# Altium PCB pcb.PcbDoc (part 4 of 9)
Units mil, origin at the board's own origin, x right, y up, seen from the top; angles counter-clockwise.
Board outline 3937.01 x 3937.01 mil, 4 copper layers (Top Layer, Ground plane, Power plane, Bottom Layer), stack 51.4 mil thick; 310 components, 276 nets, 1704 pads, 977 vias.
Unrouted connection lines stored in the file: 44.
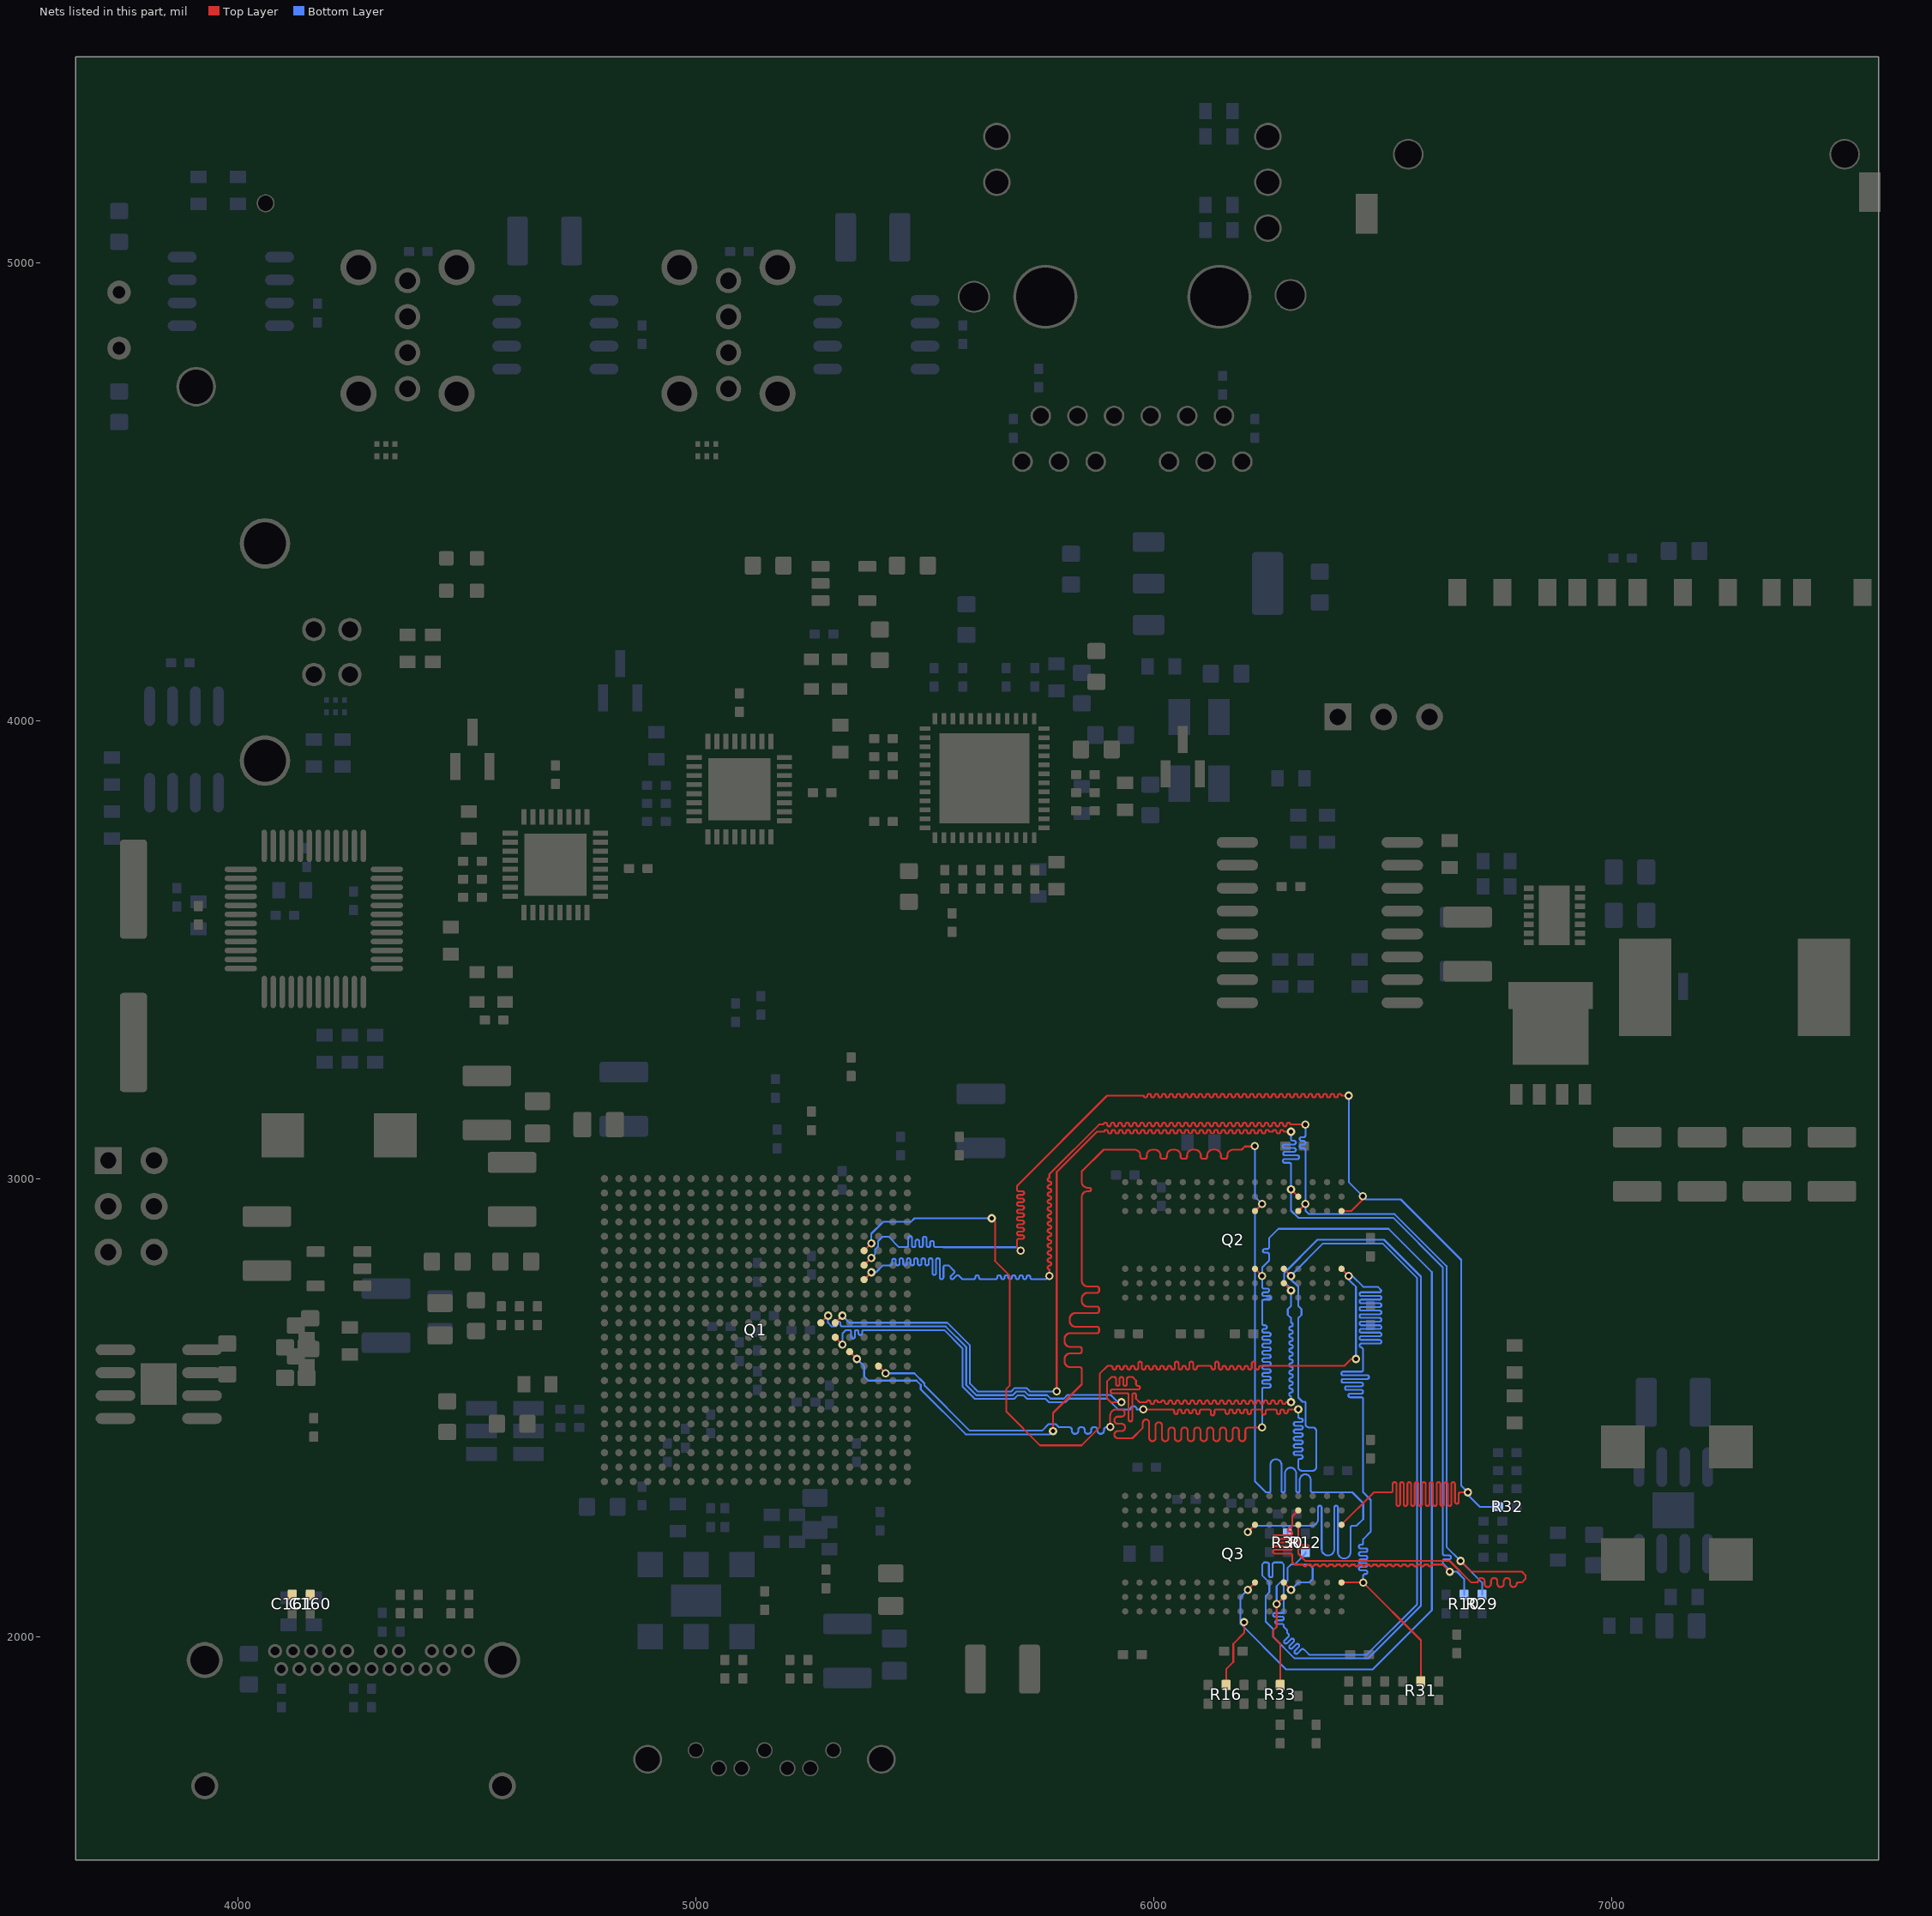
[diagram p5: the nets of this part, all layers, seen from the top]

## Via types
v1: diameter 18, hole 10, Top Layer to Bottom Layer, 932 vias
v2: diameter 19.68, hole 9.84, Top Layer to Bottom Layer, tented both sides, 18 vias
v3: diameter 19.68, hole 9.84, Top Layer to Bottom Layer, 16 vias
v4: diameter 19.68, hole 7.87, Top Layer to Bottom Layer, 11 vias

## Nets (pads, with @x,y where several pads share a name; then routed paths per layer and width w, separated by ;. In a path a pad name is that pad's centre, name@x,y a point inside that pad or via, vN(x,y) a via of type N, cw(c..) or ccw(c..) an arc to the next point about the centre after c; other vN are vias at no path point) (continued)
A12: Q1.H19 Q2.N7 Q3.N7 R29.1 | length 4188.3
  Top Layer w4: Q1.H19@5366.93,2779.53 v1(5382.68,2795.28) ; v1(5771.65,2787.4) 5771.65,2801.86 cw(c5771.65,2805.86) 5771.65,2809.86 ccw(c5771.65,2813.86) 5771.65,2817.86 cw(c5771.65,2821.86) 5771.65,2825.86 ccw(c5771.65,2829.86) 5771.65,2833.86 cw(c5771.65,2837.86) 5771.65,2841.86 ccw(c5771.65,2845.86) 5771.65,2849.86 cw(c5771.65,2853.86) 5771.65,2857.86 ccw(c5771.65,2861.86) 5771.65,2865.86 cw(c5771.65,2869.86) 5771.65,2873.86 ccw(c5771.65,2877.86) 5771.65,2881.86 cw(c5771.65,2885.86) 5771.65,2889.86 ccw(c5771.65,2893.86) 5771.65,2897.86 cw(c5771.65,2901.86) 5771.65,2905.86 ccw(c5771.65,2909.86) 5771.65,2913.86 cw(c5771.65,2917.86) 5771.65,2921.86 ccw(c5771.65,2925.86) 5771.65,2929.86 cw(c5771.65,2933.86) 5771.65,2937.86 ccw(c5771.65,2941.86) 5771.65,2945.86 cw(c5771.65,2949.86) 5771.65,2953.86 ccw(c5771.65,2957.86) 5771.65,2961.86 cw(c5771.65,2965.86) 5771.65,2969.86 ccw(c5771.65,2973.86) 5771.65,2977.86 cw(c5771.65,2981.86) 5771.65,2985.86 ccw(c5771.65,2989.86) 5771.65,2993.86 cw(c5771.65,2997.86) 5771.65,3001.86 5771.65,3009.86 5879.9,3118.11 5889.76,3118.11 cw(c5893.76,3118.11) 5897.76,3118.11 ccw(c5901.76,3118.11) 5905.76,3118.11 cw(c5909.76,3118.11) 5913.76,3118.11 ccw(c5917.76,3118.11) 5921.76,3118.11 cw(c5925.76,3118.11) 5929.76,3118.11 ccw(c5933.76,3118.11) 5937.76,3118.11 cw(c5941.76,3118.11) 5945.76,3118.11 ccw(c5949.76,3118.11) 5953.76,3118.11 cw(c5957.76,3118.11) 5961.76,3118.11 ccw(c5965.76,3118.11) 5969.76,3118.11 cw(c5973.76,3118.11) 5977.76,3118.11 ccw(c5981.76,3118.11) 5985.76,3118.11 cw(c5989.76,3118.11) 5993.76,3118.11 ccw(c5997.76,3118.11) 6001.76,3118.11 cw(c6005.76,3118.11) 6009.76,3118.11 ccw(c6013.76,3118.11) 6017.76,3118.11 cw(c6021.76,3118.11) 6025.76,3118.11 ccw(c6029.76,3118.11) 6033.76,3118.11 cw(c6037.76,3118.11) 6041.76,3118.11 ccw(c6045.76,3118.11) 6049.76,3118.11 cw(c6053.76,3118.11) 6057.76,3118.11 ccw(c6061.76,3118.11) 6065.76,3118.11 cw(c6069.76,3118.11) 6073.76,3118.11 ccw(c6077.76,3118.11) 6081.76,3118.11 cw(c6085.76,3118.11) 6089.76,3118.11 ccw(c6093.76,3118.11) 6097.76,3118.11 cw(c6101.76,3118.11) 6105.76,3118.11 ccw(c6109.76,3118.11) 6113.76,3118.11 cw(c6117.76,3118.11) 6121.76,3118.11 ccw(c6125.76,3118.11) 6129.76,3118.11 cw(c6133.76,3118.11) 6137.76,3118.11 ccw(c6141.76,3118.11) 6145.76,3118.11 cw(c6149.76,3118.11) 6153.76,3118.11 ccw(c6157.76,3118.11) 6161.76,3118.11 cw(c6165.76,3118.11) 6169.76,3118.11 ccw(c6173.76,3118.11) 6177.76,3118.11 cw(c6181.76,3118.11) 6185.76,3118.11 ccw(c6189.76,3118.11) 6193.76,3118.11 cw(c6197.76,3118.11) 6201.76,3118.11 ccw(c6205.76,3118.11) 6209.76,3118.11 cw(c6213.76,3118.11) 6217.76,3118.11 ccw(c6221.76,3118.11) 6225.76,3118.11 cw(c6229.76,3118.11) 6233.76,3118.11 ccw(c6237.76,3118.11) 6241.76,3118.11 cw(c6245.76,3118.11) 6249.76,3118.11 ccw(c6253.76,3118.11) 6257.76,3118.11 cw(c6261.76,3118.11) 6265.76,3118.11 ccw(c6269.76,3118.11) 6273.76,3118.11 cw(c6277.76,3118.11) 6281.76,3118.11 ccw(c6285.76,3118.11) 6289.76,3118.11 cw(c6293.76,3118.11) 6297.76,3118.11 v1(6330.71,3118.11) ; Q3.N7@6314.96,2244.09 6314.96,2204.22 ccw(c6318.96,2204.22) 6318.96,2200.22 6334.47,2200.22 cw(c6334.47,2196.22) 6338.47,2196.22 cw(c6334.47,2196.22) 6334.47,2192.22 6318.21,2192.22 ccw(c6318.21,2188.98) 6314.96,2188.98 6314.96,2181.1 6330.71,2165.35 6645.67,2165.35 6692.91,2118.11 6704.79,2118.11 ccw(c6704.79,2121.11) 6707.79,2121.11 cw(c6714.79,2121.11) 6714.79,2128.11 cw(c6714.79,2121.11) 6721.79,2121.11 6721.79,2115.24 ccw(c6728.79,2115.24) 6728.79,2108.24 ccw(c6728.79,2115.24) 6735.79,2115.24 6735.79,2120.98 cw(c6742.79,2120.98) 6742.79,2127.98 cw(c6742.79,2120.98) 6749.79,2120.98 6749.79,2115.24 ccw(c6756.79,2115.24) 6756.79,2108.24 ccw(c6756.79,2115.24) 6763.79,2115.24 6763.79,2120.99 cw(c6770.79,2120.99) 6770.79,2127.99 cw(c6770.79,2120.99) 6777.79,2120.99 6777.79,2115.24 ccw(c6784.79,2115.24) 6784.79,2108.24 ccw(c6784.79,2115.24) 6791.79,2115.15 ; Q2.N7@6314.96,2929.13 v1(6330.71,2944.88) ; v1(6669.29,2165.35) 6693.04,2141.61 6735.6,2141.61 6735.72,2141.73 6803.15,2141.73 6811.02,2133.86 6811.02,2125.98 6803.15,2118.11 6794.79,2118.11 ccw(c6794.79,2115.11) 6791.79,2115.2 ; 6791.79,2115.15 cw(c6794.79,2115.11) 6791.79,2115.2 ; 6791.79,2115.15 ccw(c6784.79,2115.24) 6791.79,2115.2 ; 6791.79,2115.15 6791.79,2115.2
  Bottom Layer w4: v1(5382.68,2795.28) 5392.96,2795.28 5408.21,2810.53 5424.21,2810.53 ccw(c5424.21,2814.53) 5428.21,2814.53 5428.21,2820.81 cw(c5432.21,2820.81) 5432.21,2824.81 cw(c5432.21,2820.81) 5436.21,2820.81 5436.21,2814.53 ccw(c5440.21,2814.53) 5440.21,2810.53 ccw(c5440.21,2814.53) 5444.21,2814.53 5444.21,2822.14 cw(c5448.21,2822.14) 5448.21,2826.14 cw(c5448.21,2822.14) 5452.21,2822.14 5452.21,2814.53 ccw(c5456.21,2814.53) 5456.21,2810.53 ccw(c5456.21,2814.53) 5460.21,2814.53 5460.21,2822.14 cw(c5464.21,2822.14) 5464.21,2826.14 cw(c5464.21,2822.14) 5468.21,2822.14 5468.21,2814.53 ccw(c5472.21,2814.53) 5472.21,2810.53 ccw(c5472.21,2814.53) 5476.21,2814.53 5476.21,2822.14 cw(c5480.21,2822.14) 5480.21,2826.14 cw(c5480.21,2822.14) 5484.21,2822.14 5484.21,2814.53 ccw(c5488.21,2814.53) 5488.21,2810.53 ccw(c5488.21,2814.53) 5492.21,2814.53 5492.21,2822.14 cw(c5496.21,2822.14) 5496.21,2826.14 cw(c5496.21,2822.14) 5500.21,2822.14 5500.21,2814.53 ccw(c5504.21,2814.53) 5504.21,2810.53 ccw(c5504.21,2814.53) 5508.21,2814.53 5508.21,2822.14 cw(c5512.21,2822.14) 5512.21,2826.14 cw(c5512.21,2822.14) 5516.21,2822.14 5516.21,2793.85 ccw(c5520.21,2793.85) 5520.21,2789.85 ccw(c5520.21,2793.85) 5524.21,2793.85 5524.21,2822.14 cw(c5528.21,2822.14) 5528.21,2826.14 cw(c5528.21,2822.14) 5532.21,2822.14 5532.21,2784.4 ccw(c5536.21,2784.4) 5536.21,2780.4 ccw(c5536.21,2784.4) 5540.21,2784.4 5540.21,2806.53 cw(c5544.21,2806.53) 5544.21,2810.53 5551.68,2810.53 5562.99,2799.21 cw(c5560.16,2796.39) 5562.99,2793.56 5556.66,2787.23 ccw(c5559.49,2784.4) 5556.66,2781.57 ccw(c5559.49,2784.4) 5562.32,2781.57 5568.65,2787.9 cw(c5571.48,2785.07) 5574.3,2787.9 5581.8,2780.4 5605.8,2780.4 ccw(c5605.8,2784.4) 5609.8,2784.4 5609.8,2784.86 cw(c5613.8,2784.86) 5613.8,2788.86 cw(c5613.8,2784.86) 5617.8,2784.86 5617.8,2784.4 ccw(c5621.8,2784.4) 5621.8,2780.4 5653.8,2780.4 ccw(c5653.8,2784.4) 5657.8,2784.4 5657.8,2784.99 cw(c5661.8,2784.99) 5661.8,2788.99 cw(c5661.8,2784.99) 5665.8,2784.99 5665.8,2784.4 ccw(c5669.8,2784.4) 5669.8,2780.4 ccw(c5669.8,2784.4) 5673.8,2784.4 5673.8,2784.99 cw(c5677.8,2784.99) 5677.8,2788.99 cw(c5677.8,2784.99) 5681.8,2784.99 5681.8,2784.4 ccw(c5685.8,2784.4) 5685.8,2780.4 ccw(c5685.8,2784.4) 5689.8,2784.4 5689.8,2784.99 cw(c5693.8,2784.99) 5693.8,2788.99 cw(c5693.8,2784.99) 5697.8,2784.99 5697.8,2784.4 ccw(c5701.8,2784.4) 5701.8,2780.4 ccw(c5701.8,2784.4) 5705.8,2784.4 5705.8,2784.99 cw(c5709.8,2784.99) 5709.8,2788.99 cw(c5709.8,2784.99) 5713.8,2784.99 5713.8,2784.4 ccw(c5717.8,2784.4) 5717.8,2780.4 ccw(c5717.8,2784.4) 5721.8,2784.4 5721.8,2784.87 cw(c5725.8,2784.87) 5725.8,2788.87 cw(c5725.8,2784.87) 5729.8,2784.87 5729.8,2784.4 ccw(c5733.8,2784.4) 5733.8,2780.4 5764.65,2780.4 v1(5771.65,2787.4) ; v1(6330.71,3118.11) 6330.71,3094.36 cw(c6326.71,3094.36) 6326.71,3090.36 6322.02,3090.36 ccw(c6322.02,3086.36) 6318.02,3086.36 ccw(c6322.02,3086.36) 6322.02,3082.36 6326.71,3082.36 cw(c6326.71,3078.36) 6330.71,3078.36 cw(c6326.71,3078.36) 6326.71,3074.36 6322.02,3074.36 ccw(c6322.02,3070.36) 6318.02,3070.36 ccw(c6322.02,3070.36) 6322.02,3066.36 6326.71,3066.36 cw(c6326.71,3062.36) 6330.71,3062.36 v1(6330.71,2944.88) 6330.71,2930.28 6338.58,2922.4 6525.46,2922.4 6638.69,2809.18 6638.69,2195.96 v1(6669.29,2165.35) 6716.54,2118.11 R29.1@6716.54,2091.14
A13: Q1.F19 Q2.T3 Q3.T3 R31.1 | length 4362.6
  Top Layer w4: Q1.F19@5366.93,2842.52 v1(5382.68,2858.27) ; v1(5645.54,2913.26) 5652.8,2906.01 5652.8,2820.56 5652.54,2820.31 5684.66,2788.19 5684.66,2547.87 5677.66,2540.87 5677.66,2491.1 5751.18,2417.57 5841.78,2417.57 5881.27,2457.07 5881.27,2573.93 5898.64,2591.3 5905.51,2591.3 cw(c5905.51,2587.3) 5909.51,2587.3 5909.51,2587.02 ccw(c5913.51,2587.02) 5913.51,2583.02 ccw(c5913.51,2587.02) 5917.51,2587.02 5917.51,2587.3 cw(c5921.51,2587.3) 5921.51,2591.3 cw(c5921.51,2587.3) 5925.51,2587.3 5925.51,2587.02 ccw(c5929.51,2587.02) 5929.51,2583.02 ccw(c5929.51,2587.02) 5933.51,2587.02 5933.51,2587.3 cw(c5937.51,2587.3) 5937.51,2591.3 cw(c5937.51,2587.3) 5941.51,2587.3 5941.51,2587.02 ccw(c5945.51,2587.02) 5945.51,2583.02 ccw(c5945.51,2587.02) 5949.51,2587.02 5949.51,2587.3 cw(c5953.51,2587.3) 5953.51,2591.3 cw(c5953.51,2587.3) 5957.51,2587.3 5957.51,2587.02 ccw(c5961.51,2587.02) 5961.51,2583.02 ccw(c5961.51,2587.02) 5965.51,2587.02 5965.51,2596.45 cw(c5969.51,2596.45) 5969.51,2600.45 cw(c5969.51,2596.45) 5973.51,2596.45 5973.51,2587.02 ccw(c5977.51,2587.02) 5977.51,2583.02 ccw(c5977.51,2587.02) 5981.51,2587.02 5981.51,2587.3 cw(c5985.51,2587.3) 5985.51,2591.3 cw(c5985.51,2587.3) 5989.51,2587.3 5989.51,2587.02 ccw(c5993.51,2587.02) 5993.51,2583.02 ccw(c5993.51,2587.02) 5997.51,2587.02 5997.51,2587.3 cw(c6001.51,2587.3) 6001.51,2591.3 cw(c6001.51,2587.3) 6005.51,2587.3 6005.51,2587.02 ccw(c6009.51,2587.02) 6009.51,2583.02 ccw(c6009.51,2587.02) 6013.51,2587.02 6013.51,2587.3 cw(c6017.51,2587.3) 6017.51,2591.3 cw(c6017.51,2587.3) 6021.51,2587.3 6021.51,2587.02 ccw(c6025.51,2587.02) 6025.51,2583.02 ccw(c6025.51,2587.02) 6029.51,2587.02 6029.51,2587.3 cw(c6033.51,2587.3) 6033.51,2591.3 cw(c6033.51,2587.3) 6037.51,2587.3 6037.51,2587.02 ccw(c6041.51,2587.02) 6041.51,2583.02 ccw(c6041.51,2587.02) 6045.51,2587.02 6045.51,2596.35 cw(c6049.51,2596.35) 6049.51,2600.35 cw(c6049.51,2596.35) 6053.51,2596.35 6053.51,2587.02 ccw(c6057.51,2587.02) 6057.51,2583.02 ccw(c6057.51,2587.02) 6061.51,2587.02 6061.51,2587.3 cw(c6065.51,2587.3) 6065.51,2591.3 cw(c6065.51,2587.3) 6069.51,2587.3 6069.51,2587.02 ccw(c6073.51,2587.02) 6073.51,2583.02 ccw(c6073.51,2587.02) 6077.51,2587.02 6077.51,2596.45 cw(c6081.51,2596.45) 6081.51,2600.45 cw(c6081.51,2596.45) 6085.51,2596.45 6085.51,2587.02 ccw(c6089.51,2587.02) 6089.51,2583.02 ccw(c6089.51,2587.02) 6093.51,2587.02 6093.51,2587.3 cw(c6097.51,2587.3) 6097.51,2591.3 6121.45,2591.3 cw(c6121.45,2587.3) 6125.45,2587.3 6125.45,2587.02 ccw(c6129.45,2587.02) 6129.45,2583.02 ccw(c6129.45,2587.02) 6133.45,2587.02 6133.45,2596.49 cw(c6137.45,2596.49) 6137.45,2600.49 cw(c6137.45,2596.49) 6141.45,2596.49 6141.45,2587.02 ccw(c6145.45,2587.02) 6145.45,2583.02 ccw(c6145.45,2587.02) 6149.45,2587.02 6149.45,2587.3 cw(c6153.45,2587.3) 6153.45,2591.3 cw(c6153.45,2587.3) 6157.45,2587.3 6157.45,2587.02 ccw(c6161.45,2587.02) 6161.45,2583.02 ccw(c6161.45,2587.02) 6165.45,2587.02 6165.45,2587.3 cw(c6169.45,2587.3) 6169.45,2591.3 cw(c6169.45,2587.3) 6173.45,2587.3 6173.45,2587.02 ccw(c6177.45,2587.02) 6177.45,2583.02 ccw(c6177.45,2587.02) 6181.45,2587.02 6181.45,2587.3 cw(c6185.45,2587.3) 6185.45,2591.3 cw(c6185.45,2587.3) 6189.45,2587.3 6189.45,2587.02 ccw(c6193.45,2587.02) 6193.45,2583.02 ccw(c6193.45,2587.02) 6197.45,2587.02 6197.45,2587.3 cw(c6201.45,2587.3) 6201.45,2591.3 cw(c6201.45,2587.3) 6205.45,2587.3 6205.45,2587.02 ccw(c6209.45,2587.02) 6209.45,2583.02 ccw(c6209.45,2587.02) 6213.45,2587.02 6213.45,2596.31 cw(c6217.45,2596.31) 6217.45,2600.31 cw(c6217.45,2596.31) 6221.45,2596.31 6221.45,2587.02 ccw(c6225.45,2587.02) 6225.45,2583.02 ccw(c6225.45,2587.02) 6229.45,2587.02 6229.45,2587.3 cw(c6233.45,2587.3) 6233.45,2591.3 6415.66,2591.3 6430.66,2606.3 v1(6440.94,2606.3) ; Q3.T3@6409.45,2118.11 v1(6456.69,2118.11) 6582.68,1992.13 R31.1@6582.68,1902.17 ; Q2.T3@6409.45,2803.15 v1(6425.2,2787.4)
  Bottom Layer w4: v1(5382.68,2858.27) 5382.68,2879.48 5408.71,2905.51 5469.29,2905.51 5477.04,2913.26 v1(5645.54,2913.26) ; v1(6440.94,2606.3) 6440.94,2763.78 6433.07,2771.65 6425.2,2779.53 v1(6425.2,2787.4) 6433.07,2787.4 6456.69,2763.78 6488.69,2763.78 6496.69,2755.78 cw(c6492.69,2755.78) 6492.69,2751.78 6452.67,2751.78 ccw(c6452.67,2747.78) 6448.67,2747.78 ccw(c6452.67,2747.78) 6452.67,2743.78 6492.69,2743.78 cw(c6492.69,2739.78) 6496.69,2739.78 cw(c6492.69,2739.78) 6492.69,2735.78 6452.67,2735.78 ccw(c6452.67,2731.78) 6448.67,2731.78 ccw(c6452.67,2731.78) 6452.67,2727.78 6492.69,2727.78 cw(c6492.69,2723.78) 6496.69,2723.78 cw(c6492.69,2723.78) 6492.69,2719.78 6452.67,2719.78 ccw(c6452.67,2715.78) 6448.67,2715.78 ccw(c6452.67,2715.78) 6452.67,2711.78 6492.69,2711.78 cw(c6492.69,2707.78) 6496.69,2707.78 cw(c6492.69,2707.78) 6492.69,2703.78 6452.67,2703.78 ccw(c6452.67,2699.78) 6448.67,2699.78 ccw(c6452.67,2699.78) 6452.67,2695.78 6492.69,2695.78 cw(c6492.69,2691.78) 6496.69,2691.78 cw(c6492.69,2691.78) 6492.69,2687.78 6452.67,2687.78 ccw(c6452.67,2683.78) 6448.67,2683.78 ccw(c6452.67,2683.78) 6452.67,2679.78 6492.69,2679.78 cw(c6492.69,2675.78) 6496.69,2675.78 cw(c6492.69,2675.78) 6492.69,2671.78 6452.67,2671.78 ccw(c6452.67,2667.78) 6448.67,2667.78 ccw(c6452.67,2667.78) 6452.67,2663.78 6492.69,2663.78 cw(c6492.69,2659.78) 6496.69,2659.78 cw(c6492.69,2659.78) 6492.69,2655.78 6452.67,2655.78 ccw(c6452.67,2651.78) 6448.67,2651.78 ccw(c6452.67,2651.78) 6452.67,2647.78 6492.69,2647.78 cw(c6492.69,2643.78) 6496.69,2643.78 cw(c6492.69,2643.78) 6492.69,2639.78 6452.67,2639.78 ccw(c6452.67,2635.78) 6448.67,2635.78 ccw(c6452.67,2635.78) 6452.67,2631.78 6456.69,2627.75 6456.69,2582.55 cw(c6452.69,2582.55) 6452.69,2578.55 6413.11,2578.55 ccw(c6413.11,2574.55) 6409.11,2574.55 ccw(c6413.11,2574.55) 6413.11,2570.55 6465.62,2570.55 cw(c6465.62,2566.55) 6469.62,2566.55 cw(c6465.62,2566.55) 6465.62,2562.55 6413.33,2562.55 ccw(c6413.33,2558.55) 6409.33,2558.55 ccw(c6413.33,2558.55) 6413.33,2554.55 6452.69,2554.55 cw(c6452.69,2550.55) 6456.69,2550.55 cw(c6452.69,2550.55) 6452.69,2546.55 6420.97,2546.55 ccw(c6420.97,2542.55) 6416.97,2542.55 ccw(c6420.97,2542.55) 6420.97,2538.55 6452.69,2538.55 cw(c6452.69,2534.55) 6456.69,2534.55 cw(c6452.69,2534.55) 6452.69,2530.55 6428.23,2530.55 ccw(c6428.23,2526.55) 6424.23,2526.55 ccw(c6428.23,2526.55) 6428.23,2522.55 6452.69,2522.55 cw(c6452.69,2518.55) 6456.69,2518.55 6456.69,2314.96 6473.35,2298.3 6473.35,2229.26 6456.69,2212.6 6456.69,2204.6 cw(c6452.69,2204.6) 6452.69,2200.6 6451.36,2200.6 ccw(c6451.36,2196.6) 6447.36,2196.6 ccw(c6451.36,2196.6) 6451.36,2192.6 6462.03,2192.6 cw(c6462.03,2188.6) 6466.03,2188.6 cw(c6462.03,2188.6) 6462.03,2184.6 6451.36,2184.6 ccw(c6451.36,2180.6) 6447.36,2180.6 ccw(c6451.36,2180.6) 6451.36,2176.6 6462.03,2176.6 cw(c6462.03,2172.6) 6466.03,2172.6 cw(c6462.03,2172.6) 6462.03,2168.6 6451.36,2168.6 ccw(c6451.36,2164.6) 6447.36,2164.6 ccw(c6451.36,2164.6) 6451.36,2160.6 6462.03,2160.6 cw(c6462.03,2156.6) 6466.03,2156.6 cw(c6462.03,2156.6) 6462.03,2152.6 6451.45,2152.6 ccw(c6451.45,2148.6) 6447.45,2148.6 ccw(c6451.45,2148.6) 6451.45,2144.6 6462.03,2144.6 cw(c6462.03,2140.6) 6466.03,2140.6 cw(c6462.03,2140.6) 6462.03,2136.6 6460.69,2136.6 ccw(c6460.69,2132.6) 6456.69,2132.6 v1(6456.69,2118.11)
A14: Q1.G19 Q2.T7 Q3.T7 R32.1 | length 4218.7
  Top Layer w4: Q1.G19@5366.93,2811.02 v1(5382.68,2826.77) ; v1(5708.66,2842.52) 5700.79,2850.39 5700.79,2864.38 cw(c5704.79,2864.38) 5704.79,2868.38 5712.41,2868.38 ccw(c5712.41,2872.38) 5716.41,2872.38 ccw(c5712.41,2872.38) 5712.41,2876.38 5704.79,2876.38 cw(c5704.79,2880.38) 5700.79,2880.38 cw(c5704.79,2880.38) 5704.79,2884.38 5712.41,2884.38 ccw(c5712.41,2888.38) 5716.41,2888.38 ccw(c5712.41,2888.38) 5712.41,2892.38 5704.79,2892.38 cw(c5704.79,2896.38) 5700.79,2896.38 cw(c5704.79,2896.38) 5704.79,2900.38 5712.41,2900.38 ccw(c5712.41,2904.38) 5716.41,2904.38 ccw(c5712.41,2904.38) 5712.41,2908.38 5704.79,2908.38 cw(c5704.79,2912.38) 5700.79,2912.38 cw(c5704.79,2912.38) 5704.79,2916.38 5712.41,2916.38 ccw(c5712.41,2920.38) 5716.41,2920.38 ccw(c5712.41,2920.38) 5712.41,2924.38 5704.79,2924.38 cw(c5704.79,2928.38) 5700.79,2928.38 cw(c5704.79,2928.38) 5704.79,2932.38 5712.41,2932.38 ccw(c5712.41,2936.38) 5716.41,2936.38 ccw(c5712.41,2936.38) 5712.41,2940.38 5704.79,2940.38 cw(c5704.79,2944.38) 5700.79,2944.38 cw(c5704.79,2944.38) 5704.79,2948.38 5712.41,2948.38 ccw(c5712.41,2952.38) 5716.41,2952.38 ccw(c5712.41,2952.38) 5712.41,2956.38 5704.79,2956.38 cw(c5704.79,2960.38) 5700.79,2960.38 cw(c5704.79,2960.38) 5704.79,2964.38 5712.41,2964.38 ccw(c5712.41,2968.38) 5716.41,2968.38 ccw(c5712.41,2968.38) 5712.41,2972.38 5704.79,2972.38 cw(c5704.79,2976.38) 5700.79,2976.38 5700.79,2984.25 5897.64,3181.1 5977.45,3181.1 ccw(c5981.45,3181.1) 5985.45,3181.1 cw(c5989.45,3181.1) 5993.45,3181.1 ccw(c5997.45,3181.1) 6001.45,3181.1 cw(c6005.45,3181.1) 6009.45,3181.1 ccw(c6013.45,3181.1) 6017.45,3181.1 cw(c6021.45,3181.1) 6025.45,3181.1 ccw(c6029.45,3181.1) 6033.45,3181.1 cw(c6037.45,3181.1) 6041.45,3181.1 ccw(c6045.45,3181.1) 6049.45,3181.1 cw(c6053.45,3181.1) 6057.45,3181.1 ccw(c6061.45,3181.1) 6065.45,3181.1 cw(c6069.45,3181.1) 6073.45,3181.1 ccw(c6077.45,3181.1) 6081.45,3181.1 cw(c6085.45,3181.1) 6089.45,3181.1 ccw(c6093.45,3181.1) 6097.45,3181.1 cw(c6101.45,3181.1) 6105.45,3181.1 ccw(c6109.45,3181.1) 6113.45,3181.1 cw(c6117.45,3181.1) 6121.45,3181.1 ccw(c6125.45,3181.1) 6129.45,3181.1 cw(c6133.45,3181.1) 6137.45,3181.1 ccw(c6141.45,3181.1) 6145.45,3181.1 cw(c6149.45,3181.1) 6153.45,3181.1 ccw(c6157.45,3181.1) 6161.45,3181.1 cw(c6165.45,3181.1) 6169.45,3181.1 ccw(c6173.45,3181.1) 6177.45,3181.1 cw(c6181.45,3181.1) 6185.45,3181.1 ccw(c6189.45,3181.1) 6193.45,3181.1 cw(c6197.45,3181.1) 6201.45,3181.1 ccw(c6205.45,3181.1) 6209.45,3181.1 cw(c6213.45,3181.1) 6217.45,3181.1 ccw(c6221.45,3181.1) 6225.45,3181.1 cw(c6229.45,3181.1) 6233.45,3181.1 ccw(c6237.45,3181.1) 6241.45,3181.1 cw(c6245.45,3181.1) 6249.45,3181.1 ccw(c6253.45,3181.1) 6257.45,3181.1 cw(c6261.45,3181.1) 6265.45,3181.1 ccw(c6269.45,3181.1) 6273.45,3181.1 cw(c6277.45,3181.1) 6281.45,3181.1 ccw(c6285.45,3181.1) 6289.45,3181.1 cw(c6293.45,3181.1) 6297.45,3181.1 ccw(c6301.45,3181.1) 6305.45,3181.1 cw(c6309.45,3181.1) 6313.45,3181.1 ccw(c6317.45,3181.1) 6321.45,3181.1 cw(c6325.45,3181.1) 6329.45,3181.1 ccw(c6333.45,3181.1) 6337.45,3181.1 cw(c6341.45,3181.1) 6345.45,3181.1 ccw(c6349.45,3181.1) 6353.45,3181.1 cw(c6357.45,3181.1) 6361.45,3181.1 ccw(c6365.45,3181.1) 6369.45,3181.1 cw(c6373.45,3181.1) 6377.45,3181.1 ccw(c6381.45,3181.1) 6385.45,3181.1 cw(c6389.45,3181.1) 6393.45,3181.1 ccw(c6397.45,3181.1) 6401.45,3181.1 cw(c6405.45,3181.1) 6409.45,3181.1 v1(6425.2,3181.1) ; Q3.T7@6409.45,2244.09 6480.32,2314.96 6480.72,2314.96 ; Q2.T7@6409.45,2929.13 6430.66,2929.13 6455.94,2954.42 v1(6455.94,2961.4) ; 6480.52,2314.76 6480.72,2314.96 ; v1(6685.04,2314.96) 6669.29,2314.96 ccw(c6669.29,2310.96) 6665.29,2310.96 6665.29,2294.18 cw(c6661.29,2294.18) 6661.29,2290.18 cw(c6661.29,2294.18) 6657.29,2294.18 6657.29,2333.23 ccw(c6653.29,2333.23) 6653.29,2337.23 ccw(c6653.29,2333.23) 6649.29,2333.23 6649.29,2289.24 cw(c6645.29,2289.24) 6645.29,2285.24 cw(c6645.29,2289.24) 6641.29,2289.24 6641.29,2333.23 ccw(c6637.29,2333.23) 6637.29,2337.23 ccw(c6637.29,2333.23) 6633.29,2333.23 6633.29,2289.24 cw(c6629.29,2289.24) 6629.29,2285.24 cw(c6629.29,2289.24) 6625.29,2289.24 6625.29,2333.23 ccw(c6621.29,2333.23) 6621.29,2337.23 ccw(c6621.29,2333.23) 6617.29,2333.23 6617.29,2289.24 cw(c6613.29,2289.24) 6613.29,2285.24 cw(c6613.29,2289.24) 6609.29,2289.24 6609.29,2333.23 ccw(c6605.29,2333.23) 6605.29,2337.23 ccw(c6605.29,2333.23) 6601.29,2333.23 6601.29,2289.24 cw(c6597.29,2289.24) 6597.29,2285.24 cw(c6597.29,2289.24) 6593.29,2289.24 6593.29,2333.23 ccw(c6589.29,2333.23) 6589.29,2337.23 ccw(c6589.29,2333.23) 6585.29,2333.23 6585.29,2289.24 cw(c6581.29,2289.24) 6581.29,2285.24 cw(c6581.29,2289.24) 6577.29,2289.24 6577.29,2333.23 ccw(c6573.29,2333.23) 6573.29,2337.23 ccw(c6573.29,2333.23) 6569.29,2333.23 6569.29,2289.24 cw(c6565.29,2289.24) 6565.29,2285.24 cw(c6565.29,2289.24) 6561.29,2289.24 6561.29,2333.23 ccw(c6557.29,2333.23) 6557.29,2337.23 ccw(c6557.29,2333.23) 6553.29,2333.23 6553.29,2289.24 cw(c6549.29,2289.24) 6549.29,2285.24 cw(c6549.29,2289.24) 6545.29,2289.24 6545.29,2333.23 ccw(c6541.29,2333.23) 6541.29,2337.23 ccw(c6541.29,2333.23) 6537.29,2333.23 6537.29,2289.24 cw(c6533.29,2289.24) 6533.29,2285.24 cw(c6533.29,2289.24) 6529.29,2289.24 6529.29,2333.23 ccw(c6525.29,2333.23) 6525.29,2337.23 ccw(c6525.29,2333.23) 6521.29,2333.23 6521.29,2318.96 cw(c6517.29,2318.96) 6517.29,2314.96 6480.72,2314.96
  Bottom Layer w4: v1(5382.68,2826.77) 5391.17,2835.27 5391.17,2845.55 5397.68,2852.05 5397.68,2862.98 5407.96,2873.27 5420.39,2873.27 5443.26,2850.39 5459.26,2850.39 ccw(c5459.26,2854.39) 5463.26,2854.39 5463.26,2870.76 cw(c5467.26,2870.76) 5467.26,2874.76 cw(c5467.26,2870.76) 5471.26,2870.76 5471.26,2854.39 ccw(c5475.26,2854.39) 5475.26,2850.39 ccw(c5475.26,2854.39) 5479.26,2854.39 5479.26,2862.98 cw(c5483.26,2862.98) 5483.26,2866.98 cw(c5483.26,2862.98) 5487.26,2862.98 5487.26,2854.39 ccw(c5491.26,2854.39) 5491.26,2850.39 ccw(c5491.26,2854.39) 5495.26,2854.39 5495.26,2869.29 cw(c5499.26,2869.29) 5499.26,2873.29 cw(c5499.26,2869.29) 5503.26,2869.29 5503.26,2854.39 ccw(c5507.26,2854.39) 5507.26,2850.39 ccw(c5507.26,2854.39) 5511.26,2854.39 5511.26,2859.91 cw(c5515.26,2859.91) 5515.26,2863.91 cw(c5515.26,2859.91) 5519.26,2859.91 5519.26,2854.39 ccw(c5523.26,2854.39) 5523.26,2850.39 5539.87,2850.39 5540.12,2850.14 5701.04,2850.14 v1(5708.66,2842.52) ; v1(6425.2,3181.1) 6425.2,2992.15 v1(6455.94,2961.4) 6462.94,2954.4 6538.71,2954.4 6670.69,2822.43 6670.69,2329.32 v1(6685.04,2314.96) 6685.04,2309.5 6711.07,2283.46 R32.1@6751.38,2283.46
AUX_N: C161.2
AUX_P: C160.2
BA0: Q1.L16 Q2.M2 Q3.M2 R33.1 | length 4280.2
  Top Layer w4: Q1.L16@5272.44,2685.04 v1(5288.19,2700.79) ; v1(5929.13,2511.81) 5905.51,2511.81 5897.27,2520.06 5897.27,2556.93 5907.14,2566.8 5912.88,2566.8 cw(c5912.88,2562.8) 5916.88,2562.8 5916.88,2551.56 ccw(c5920.88,2551.56) 5920.88,2547.56 ccw(c5920.88,2551.56) 5924.88,2551.56 5924.88,2562.8 cw(c5928.88,2562.8) 5928.88,2566.8 cw(c5928.88,2562.8) 5932.88,2562.8 5932.88,2551.56 ccw(c5936.88,2551.56) 5936.88,2547.56 ccw(c5936.88,2551.56) 5940.88,2551.56 5940.88,2562.8 cw(c5944.88,2562.8) 5944.88,2566.8 5952.88,2566.8 5960.63,2559.06 5960.63,2551.56 ccw(c5964.63,2551.56) 5964.63,2547.56 5965.39,2547.56 cw(c5965.39,2543.56) 5969.39,2543.56 cw(c5965.39,2543.56) 5965.39,2539.56 5909.27,2539.56 ccw(c5909.27,2535.56) 5905.27,2535.56 ccw(c5909.27,2535.56) 5909.27,2531.56 5940.63,2531.56 cw(c5940.63,2527.56) 5944.63,2527.56 5944.63,2473.84 ccw(c5948.63,2473.84) 5948.63,2469.84 ccw(c5948.63,2473.84) 5952.63,2473.84 5952.63,2527.56 cw(c5956.63,2527.56) 5956.63,2531.56 cw(c5956.63,2527.56) 5960.63,2527.56 5960.63,2519.68 5968.5,2511.81 5984.25,2511.81 cw(c5988.25,2511.81) 5992.25,2511.81 ccw(c5996.25,2511.81) 6000.25,2511.81 cw(c6004.25,2511.81) 6008.25,2511.81 6015.75,2511.81 cw(c6019.75,2511.81) 6023.75,2511.81 ccw(c6027.75,2511.81) 6031.75,2511.81 cw(c6035.75,2511.81) 6039.75,2511.81 ccw(c6043.75,2511.81) 6047.75,2511.81 cw(c6051.75,2511.81) 6055.75,2511.81 ccw(c6059.75,2511.81) 6063.75,2511.81 cw(c6067.75,2511.81) 6071.75,2511.81 ccw(c6075.75,2511.81) 6079.75,2511.81 cw(c6083.75,2511.81) 6087.75,2511.81 ccw(c6091.75,2511.81) 6095.75,2511.81 cw(c6099.75,2511.81) 6103.75,2511.81 ccw(c6107.75,2511.81) 6111.75,2511.81 cw(c6115.75,2511.81) 6119.75,2511.81 ccw(c6123.75,2511.81) 6127.75,2511.81 cw(c6131.75,2511.81) 6135.75,2511.81 ccw(c6139.75,2511.81) 6143.75,2511.81 cw(c6147.75,2511.81) 6151.75,2511.81 ccw(c6155.75,2511.81) 6159.75,2511.81 cw(c6163.75,2511.81) 6167.75,2511.81 ccw(c6171.75,2511.81) 6175.75,2511.81 cw(c6179.75,2511.81) 6183.75,2511.81 ccw(c6187.75,2511.81) 6191.75,2511.81 cw(c6195.75,2511.81) 6199.75,2511.81 ccw(c6203.75,2511.81) 6207.75,2511.81 cw(c6211.75,2511.81) 6215.75,2511.81 ccw(c6219.75,2511.81) 6223.75,2511.81 cw(c6227.75,2511.81) 6231.75,2511.81 ccw(c6235.75,2511.81) 6239.75,2511.81 cw(c6243.75,2511.81) 6247.75,2511.81 ccw(c6251.75,2511.81) 6255.75,2511.81 cw(c6259.75,2511.81) 6263.75,2511.81 ccw(c6267.75,2511.81) 6271.75,2511.81 cw(c6275.75,2511.81) 6279.75,2511.81 ccw(c6283.75,2511.81) 6287.75,2511.81 v1(6299.21,2511.81) ; R33.1@6275.59,1894.29 6275.59,1984.25 6260.59,1999.25 6260.59,2014.09 6267.72,2021.21 v1(6267.72,2070.87) Q3.M2@6283.47,2086.61 ; Q2.M2@6283.47,2771.65 v1(6299.21,2755.91)
  Bottom Layer w4: v1(5288.19,2700.79) 5288.19,2685.04 5296.06,2677.17 5303.31,2677.17 ccw(c5303.31,2681.17) 5307.31,2681.17 5307.31,2683.74 cw(c5311.31,2683.74) 5311.31,2687.74 cw(c5311.31,2683.74) 5315.31,2683.74 5315.31,2681.17 ccw(c5319.31,2681.17) 5319.31,2677.17 5545.3,2677.17 5590.05,2632.41 5590.05,2548.99 5611.98,2527.06 5691.39,2527.06 5699.14,2534.8 5718.19,2534.8 5725.94,2527.06 5766.69,2527.06 5774.06,2519.68 5803.15,2519.68 5811.02,2527.56 5905.51,2527.56 5921.26,2511.81 v1(5929.13,2511.81) ; v1(6267.72,2070.87) 6267.72,2110.24 6283.46,2125.98 6283.46,2157.48 6279.05,2161.9 6263.05,2161.9 ccw(c6263.05,2157.9) 6259.05,2157.9 6259.05,2133.36 cw(c6255.05,2133.36) 6255.05,2129.36 cw(c6255.05,2133.36) 6251.05,2133.36 6251.05,2157.9 ccw(c6247.05,2157.9) 6247.05,2161.9 6240.64,2161.9 6236.22,2157.48 6236.22,2133.86 6251.97,2118.11 6251.97,2096.9 6244.22,2089.15 6244.22,2032.4 6259.84,2016.78 6259.84,2000 6307.34,1952.5 6467.75,1952.5 6582.69,2067.43 6582.69,2785.98 6502.26,2866.4 6357,2866.4 6284.21,2793.61 6284.21,2775.84 6283.46,2775.09 6299.21,2759.35 v1(6299.21,2755.91) 6299.21,2722 6292.09,2714.87 6292.09,2702.45 6299.21,2695.32 6299.21,2685.04 cw(c6299.21,2681.04) 6299.21,2677.04 ccw(c6299.21,2673.04) 6299.21,2669.04 cw(c6299.21,2665.04) 6299.21,2661.04 ccw(c6299.21,2657.04) 6299.21,2653.04 cw(c6299.21,2649.04) 6299.21,2645.04 ccw(c6299.21,2641.04) 6299.21,2637.04 cw(c6299.21,2633.04) 6299.21,2629.04 ccw(c6299.21,2625.04) 6299.21,2621.04 cw(c6299.21,2617.04) 6299.21,2613.04 ccw(c6299.21,2609.04) 6299.21,2605.04 cw(c6299.21,2601.04) 6299.21,2597.04 ccw(c6299.21,2593.04) 6299.21,2589.04 cw(c6299.21,2585.04) 6299.21,2581.04 ccw(c6299.21,2577.04) 6299.21,2573.04 cw(c6299.21,2569.04) 6299.21,2565.04 ccw(c6299.21,2561.04) 6299.21,2557.04 cw(c6299.21,2553.04) 6299.21,2549.04 ccw(c6299.21,2545.04) 6299.21,2541.04 cw(c6299.21,2537.04) 6299.21,2533.04 ccw(c6299.21,2529.04) 6299.21,2525.04 v1(6299.21,2511.81)
BA1: Q1.L17 Q2.N8 Q3.N8 R10.1 | length 4166.7
  Top Layer w4: Q1.L17@5303.94,2685.04 v1(5319.69,2700.79) ; v1(5787.4,2535.43) 5787.4,3014.3 5875.47,3102.36 5891.34,3102.36 cw(c5895.34,3102.36) 5899.34,3102.36 ccw(c5903.34,3102.36) 5907.34,3102.36 cw(c5911.34,3102.36) 5915.34,3102.36 ccw(c5919.34,3102.36) 5923.34,3102.36 cw(c5927.34,3102.36) 5931.34,3102.36 ccw(c5935.34,3102.36) 5939.34,3102.36 cw(c5943.34,3102.36) 5947.34,3102.36 ccw(c5951.34,3102.36) 5955.34,3102.36 cw(c5959.34,3102.36) 5963.34,3102.36 ccw(c5967.34,3102.36) 5971.34,3102.36 cw(c5975.34,3102.36) 5979.34,3102.36 ccw(c5983.34,3102.36) 5987.34,3102.36 cw(c5991.34,3102.36) 5995.34,3102.36 ccw(c5999.34,3102.36) 6003.34,3102.36 cw(c6007.34,3102.36) 6011.34,3102.36 ccw(c6015.34,3102.36) 6019.34,3102.36 cw(c6023.34,3102.36) 6027.34,3102.36 ccw(c6031.34,3102.36) 6035.34,3102.36 cw(c6039.34,3102.36) 6043.34,3102.36 ccw(c6047.34,3102.36) 6051.34,3102.36 cw(c6055.34,3102.36) 6059.34,3102.36 ccw(c6063.34,3102.36) 6067.34,3102.36 cw(c6071.34,3102.36) 6075.34,3102.36 ccw(c6079.34,3102.36) 6083.34,3102.36 cw(c6087.34,3102.36) 6091.34,3102.36 ccw(c6095.34,3102.36) 6099.34,3102.36 cw(c6103.34,3102.36) 6107.34,3102.36 ccw(c6111.34,3102.36) 6115.34,3102.36 cw(c6119.34,3102.36) 6123.34,3102.36 ccw(c6127.34,3102.36) 6131.34,3102.36 cw(c6135.34,3102.36) 6139.34,3102.36 ccw(c6143.34,3102.36) 6147.34,3102.36 cw(c6151.34,3102.36) 6155.34,3102.36 ccw(c6159.34,3102.36) 6163.34,3102.36 cw(c6167.34,3102.36) 6171.34,3102.36 ccw(c6175.34,3102.36) 6179.34,3102.36 cw(c6183.34,3102.36) 6187.34,3102.36 ccw(c6191.34,3102.36) 6195.34,3102.36 cw(c6199.34,3102.36) 6203.34,3102.36 ccw(c6207.34,3102.36) 6211.34,3102.36 cw(c6215.34,3102.36) 6219.34,3102.36 ccw(c6223.34,3102.36) 6227.34,3102.36 cw(c6231.34,3102.36) 6235.34,3102.36 ccw(c6239.34,3102.36) 6243.34,3102.36 cw(c6247.34,3102.36) 6251.34,3102.36 6259.34,3102.36 cw(c6263.34,3102.36) 6267.34,3102.36 ccw(c6271.34,3102.36) 6275.34,3102.36 cw(c6279.34,3102.36) 6283.34,3102.36 v1(6299.21,3102.36) ; v1(6299.21,2976.38) Q2.N8@6314.96,2960.63 ; Q3.N8@6314.96,2275.59 6302.07,2262.7 6302.07,2241.43 6298.07,2237.43 6296.56,2237.43 ccw(c6296.56,2233.43) 6292.56,2233.43 ccw(c6296.56,2233.43) 6296.56,2229.43 6298.07,2229.43 cw(c6298.07,2225.43) 6302.07,2225.43 cw(c6298.07,2225.43) 6298.07,2221.43 6263.97,2221.43 ccw(c6263.97,2217.43) 6259.97,2217.43 ccw(c6263.97,2217.43) 6263.97,2213.43 6298.07,2213.43 cw(c6298.07,2209.43) 6302.07,2209.43 cw(c6298.07,2209.43) 6298.07,2205.43 6263.97,2205.43 ccw(c6263.97,2201.43) 6259.97,2201.43 ccw(c6263.97,2201.43) 6263.97,2197.43 6298.07,2197.43 cw(c6298.07,2193.43) 6302.07,2193.43 cw(c6298.07,2193.43) 6298.07,2189.43 6263.97,2189.43 ccw(c6263.97,2185.43) 6259.97,2185.43 ccw(c6263.97,2185.43) 6263.97,2181.43 6298.07,2181.43 cw(c6298.07,2177.43) 6302.07,2177.43 6302.07,2162.5 6307.21,2157.35 6326.3,2157.35 ccw(c6330.3,2157.35) 6334.3,2157.35 6342.3,2157.35 ccw(c6346.3,2157.35) 6350.3,2157.35 6358.3,2157.35 ccw(c6362.3,2157.35) 6366.3,2157.35 6374.3,2157.35 ccw(c6378.3,2157.35) 6382.3,2157.35 6390.3,2157.35 ccw(c6394.3,2157.35) 6398.3,2157.35 6406.3,2157.35 ccw(c6410.3,2157.35) 6414.3,2157.35 6422.3,2157.35 ccw(c6426.3,2157.35) 6430.3,2157.35 6438.3,2157.35 ccw(c6442.3,2157.35) 6446.3,2157.35 6454.3,2157.35 ccw(c6458.3,2157.35) 6462.3,2157.35 6470.3,2157.35 ccw(c6474.3,2157.35) 6478.3,2157.35 6486.3,2157.35 ccw(c6490.3,2157.35) 6494.3,2157.35 6502.3,2157.35 ccw(c6506.3,2157.35) 6510.3,2157.35 6518.3,2157.35 ccw(c6522.3,2157.35) 6526.3,2157.35 6534.3,2157.35 ccw(c6538.3,2157.35) 6542.3,2157.35 6550.3,2157.35 ccw(c6554.3,2157.35) 6558.3,2157.35 6566.3,2157.35 ccw(c6570.3,2157.35) 6574.3,2157.35 6582.3,2157.35 ccw(c6586.3,2157.35) 6590.3,2157.35 6598.3,2157.35 ccw(c6602.3,2157.35) 6606.3,2157.35 6630.05,2157.35 v1(6645.67,2141.73)
  Bottom Layer w4: v1(5319.69,2700.79) 5334.93,2685.54 5334.93,2685.28 5548.49,2685.28 5598.05,2635.73 5598.05,2552.3 5615.29,2535.06 5688.08,2535.06 5695.83,2542.8 5721.51,2542.8 5729.25,2535.06 5787.02,2535.06 v1(5787.4,2535.43) ; v1(6299.21,3102.36) 6299.21,3086.61 ccw(c6303.21,3086.61) 6303.21,3082.61 6305.91,3082.61 cw(c6305.91,3078.61) 6309.91,3078.61 cw(c6305.91,3078.61) 6305.91,3074.61 6285.33,3074.61 ccw(c6285.33,3070.61) 6281.33,3070.61 ccw(c6285.33,3070.61) 6285.33,3066.61 6305.91,3066.61 cw(c6305.91,3062.61) 6309.91,3062.61 cw(c6305.91,3062.61) 6305.91,3058.61 6286.02,3058.61 ccw(c6286.02,3054.61) 6282.02,3054.61 ccw(c6286.02,3054.61) 6286.02,3050.61 6313.1,3050.61 cw(c6313.1,3046.61) 6317.1,3046.61 cw(c6313.1,3046.61) 6313.1,3042.61 6285.33,3042.61 ccw(c6285.33,3038.61) 6281.33,3038.61 ccw(c6285.33,3038.61) 6285.33,3034.61 6295.21,3034.61 cw(c6295.21,3030.61) 6299.21,3030.61 v1(6299.21,2976.38) 6299.21,2930.15 6314.96,2914.4 6522.15,2914.4 6630.69,2805.86 6630.69,2181.1 ccw(c6634.69,2181.1) 6634.69,2177.1 6644.46,2177.1 cw(c6644.46,2173.1) 6648.46,2173.1 cw(c6644.46,2173.1) 6644.46,2169.1 6634.69,2169.1 ccw(c6634.69,2165.1) 6630.69,2165.1 6630.69,2160.16 6645.67,2145.17 v1(6645.67,2141.73) 6661.42,2141.73 6677.17,2125.98 R10.1@6677.17,2091.14
BA2: Q1.M17 Q2.M3 Q3.M3 R12.1 | length 4131.1
  Top Layer w4: Q1.M17@5303.94,2653.54 v1(5319.69,2637.79) ; v1(5976.38,2496.06) 6040,2496.06 cw(c6040,2492.06) 6044,2492.06 6044,2489.92 ccw(c6048,2489.92) 6048,2485.92 ccw(c6048,2489.92) 6052,2489.92 6052,2492.06 cw(c6056,2492.06) 6056,2496.06 cw(c6056,2492.06) 6060,2492.06 6060,2491.45 ccw(c6064,2491.45) 6064,2487.45 ccw(c6064,2491.45) 6068,2491.45 6068,2492.06 cw(c6072,2492.06) 6072,2496.06 cw(c6072,2492.06) 6076,2492.06 6076,2491.6 ccw(c6080,2491.6) 6080,2487.6 ccw(c6080,2491.6) 6084,2491.6 6084,2492.06 cw(c6088,2492.06) 6088,2496.06 cw(c6088,2492.06) 6092,2492.06 6092,2489.62 ccw(c6096,2489.62) 6096,2485.62 ccw(c6096,2489.62) 6100,2489.62 6100,2492.06 cw(c6104,2492.06) 6104,2496.06 6120,2496.06 cw(c6120,2492.06) 6124,2492.06 6124,2486.84 ccw(c6128,2486.84) 6128,2482.84 ccw(c6128,2486.84) 6132,2486.84 6132,2492.06 cw(c6136,2492.06) 6136,2496.06 6152,2496.06 cw(c6152,2492.06) 6156,2492.06 6156,2489.92 ccw(c6160,2489.92) 6160,2485.92 ccw(c6160,2489.92) 6164,2489.92 6164,2492.06 cw(c6168,2492.06) 6168,2496.06 cw(c6168,2492.06) 6172,2492.06 6172,2491.45 ccw(c6176,2491.45) 6176,2487.45 ccw(c6176,2491.45) 6180,2491.45 6180,2492.06 cw(c6184,2492.06) 6184,2496.06 cw(c6184,2492.06) 6188,2492.06 6188,2491.6 ccw(c6192,2491.6) 6192,2487.6 ccw(c6192,2491.6) 6196,2491.6 6196,2492.06 cw(c6200,2492.06) 6200,2496.06 cw(c6200,2492.06) 6204,2492.06 6204,2489.62 ccw(c6208,2489.62) 6208,2485.62 ccw(c6208,2489.62) 6212,2489.62 6212,2492.06 cw(c6216,2492.06) 6216,2496.06 6232,2496.06 cw(c6232,2492.06) 6236,2492.06 6236,2488.97 ccw(c6240,2488.97) 6240,2484.97 ccw(c6240,2488.97) 6244,2488.97 6244,2492.06 cw(c6248,2492.06) 6248,2496.06 6264,2496.06 cw(c6264,2492.06) 6268,2492.06 6268,2489.92 ccw(c6272,2489.92) 6272,2485.92 ccw(c6272,2489.92) 6276,2489.92 6276,2492.06 cw(c6280,2492.06) 6280,2496.06 cw(c6280,2492.06) 6284,2492.06 6284,2491.45 ccw(c6288,2491.45) 6288,2487.45 ccw(c6288,2491.45) 6292,2491.45 6292,2492.06 cw(c6296,2492.06) 6296,2496.06 v1(6314.96,2496.06) ; Q3.M3@6283.47,2118.11 v1(6299.21,2102.36) ; Q2.M3@6283.47,2803.15 v1(6299.21,2787.4)
  Bottom Layer w4: v1(5319.69,2637.79) 5319.69,2661.42 5327.43,2669.17 5334.68,2669.17 cw(c5334.68,2665.17) 5338.68,2665.17 5338.68,2654.78 ccw(c5342.68,2654.78) 5342.68,2650.78 ccw(c5342.68,2654.78) 5346.68,2654.78 5346.68,2665.17 cw(c5350.68,2665.17) 5350.68,2669.17 cw(c5350.68,2665.17) 5354.68,2665.17 5354.68,2662.13 ccw(c5358.68,2662.13) 5358.68,2658.13 ccw(c5358.68,2662.13) 5362.68,2662.13 5362.68,2665.17 cw(c5366.68,2665.17) 5366.68,2669.17 5541.98,2669.17 5582.05,2629.1 5582.05,2545.67 5608.67,2519.06 5694.71,2519.06 5702.45,2526.8 5714.88,2526.8 5722.63,2519.06 5763.38,2519.06 5770.75,2511.68 5806.46,2511.68 5814.34,2519.56 5897.8,2519.56 5921.3,2496.06 5948.38,2496.06 cw(c5955.38,2496.06) 5962.38,2496.06 v1(5976.38,2496.06) ; v1(6299.21,2102.36) 6314.96,2118.11 6338.58,2118.11 6346.46,2125.98 6346.46,2149.61 6338.58,2157.48 6330.71,2157.48 6330.71,2157.61 6307.09,2157.61 ; v1(6314.96,2496.06) 6314.96,2480.32 ccw(c6318.96,2480.32) 6318.96,2476.32 6320.86,2476.32 cw(c6320.86,2472.32) 6324.86,2472.32 cw(c6320.86,2472.32) 6320.86,2468.32 6309.06,2468.32 ccw(c6309.06,2464.32) 6305.06,2464.32 ccw(c6309.06,2464.32) 6309.06,2460.32 6320.86,2460.32 cw(c6320.86,2456.32) 6324.86,2456.32 cw(c6320.86,2456.32) 6320.86,2452.32 6309.06,2452.32 ccw(c6309.06,2448.32) 6305.06,2448.32 ccw(c6309.06,2448.32) 6309.06,2444.32 6320.86,2444.32 cw(c6320.86,2440.32) 6324.86,2440.32 cw(c6320.86,2440.32) 6320.86,2436.32 6309.06,2436.32 ccw(c6309.06,2432.32) 6305.06,2432.32 ccw(c6309.06,2432.32) 6309.06,2428.32 6320.86,2428.32 cw(c6320.86,2424.32) 6324.86,2424.32 cw(c6320.86,2424.32) 6320.86,2420.32 6309.06,2420.32 ccw(c6309.06,2416.32) 6305.06,2416.32 ccw(c6309.06,2416.32) 6309.06,2412.32 6320.86,2412.32 cw(c6320.86,2408.32) 6324.86,2408.32 cw(c6320.86,2408.32) 6320.86,2404.32 6309.06,2404.32 ccw(c6309.06,2400.32) 6305.06,2400.32 ccw(c6309.06,2400.32) 6309.06,2396.32 6320.86,2396.32 cw(c6320.86,2392.32) 6324.86,2392.32 cw(c6320.86,2392.32) 6320.86,2388.32 6318.96,2388.32 ccw(c6318.96,2384.32) 6314.96,2384.32 6314.96,2370.08 ccw(c6322.83,2370.08) 6322.83,2362.2 6346.46,2362.2 ccw(c6346.46,2370.08) 6354.33,2370.08 6354.33,2448.82 ccw(c6346.46,2448.82) 6346.46,2456.69 6338.58,2456.69 cw(c6338.58,2464.57) 6330.71,2464.57 6330.71,2511.81 6330.04,2512.48 6324.42,2512.48 6314.96,2521.94 6314.96,2695.32 6322.09,2702.45 6322.09,2714.87 6314.96,2722 6314.96,2763.78 6299.21,2779.53 v1(6299.21,2787.4) 6299.21,2788.43 6369.18,2858.4 6498.95,2858.4 6574.69,2782.67 6574.69,2070.75 6464.44,1960.5 6338.71,1960.5 6327.4,1971.82 ccw(c6324.57,1968.99) 6321.74,1971.82 6313.37,1963.45 cw(c6310.54,1966.27) 6307.71,1963.45 cw(c6310.54,1966.27) 6307.71,1969.1 6316.08,1977.47 ccw(c6313.25,1980.3) 6316.08,1983.13 ccw(c6313.25,1980.3) 6310.42,1983.13 6302.05,1974.76 cw(c6299.22,1977.59) 6296.4,1974.76 cw(c6299.22,1977.59) 6296.4,1980.42 6304.77,1988.79 ccw(c6301.94,1991.62) 6304.77,1994.44 ccw(c6301.94,1991.62) 6299.11,1994.45 6290.74,1986.07 cw(c6287.91,1988.9) 6285.08,1986.07 cw(c6287.91,1988.9) 6285.08,1991.73 6293.45,2000.1 ccw(c6290.63,2002.93) 6293.45,2005.76 6290.59,2008.62 6290.59,2014.09 6283.46,2021.21 6283.46,2023.62 ccw(c6279.46,2023.62) 6279.46,2027.62 6268.81,2027.62 cw(c6268.81,2031.62) 6264.81,2031.62 cw(c6268.81,2031.62) 6268.81,2035.62 6279.46,2035.62 ccw(c6279.46,2039.62) 6283.46,2039.62 ccw(c6279.46,2039.62) 6279.46,2043.62 6263.97,2043.62 cw(c6263.97,2047.62) 6259.97,2047.62 cw(c6263.97,2047.62) 6263.97,2051.62 6279.46,2051.62 ccw(c6279.46,2055.62) 6283.46,2055.62 6283.46,2114.67 6291.46,2122.67 6291.46,2149.86 6299.21,2157.61 6307.09,2157.61 ; R12.1@6330.71,2184.45 6330.71,2181.23 6307.09,2157.61
CAS: Q1.P20 Q2.K3 Q3.K3 R16.1 | length 4248
  Top Layer w4: Q1.P20@5398.43,2590.55 v1(5414.17,2574.8) ; v1(5904.27,2457.94) 5904.27,2482.52 cw(c5917.81,2482.52) 5917.81,2496.06 5928.1,2496.06 cw(c5928.1,2488.19) 5935.97,2488.19 5935.97,2487.15 cw(c5929.13,2487.15) 5929.13,2480.32 5921.26,2480.32 ccw(c5921.26,2472.44) 5913.39,2472.44 ccw(c5921.26,2472.44) 5921.26,2464.57 5929.72,2464.57 cw(c5929.72,2457.28) 5937.01,2457.28 5937.01,2456.69 cw(c5929.13,2456.69) 5929.13,2448.82 5921.26,2448.82 ccw(c5921.26,2440.94) 5913.39,2440.94 ccw(c5921.26,2440.94) 5921.26,2433.07 5952.76,2433.07 5975.5,2455.82 5975.5,2466.98 cw(c5982.5,2466.98) 5982.5,2473.98 cw(c5982.5,2466.98) 5989.5,2466.98 5989.5,2433.69 ccw(c5996.5,2433.69) 5996.5,2426.69 ccw(c5996.5,2433.69) 6003.5,2433.69 6003.5,2460.99 cw(c6010.5,2460.99) 6010.5,2467.99 cw(c6010.5,2460.99) 6017.5,2460.99 6017.5,2433.69 ccw(c6024.5,2433.69) 6024.5,2426.69 ccw(c6024.5,2433.69) 6031.5,2433.69 6031.5,2449.69 cw(c6038.5,2449.69) 6038.5,2456.69 cw(c6038.5,2449.69) 6045.5,2449.69 6045.5,2433.69 ccw(c6052.5,2433.69) 6052.5,2426.69 ccw(c6052.5,2433.69) 6059.5,2433.69 6059.5,2449.69 cw(c6066.5,2449.69) 6066.5,2456.69 cw(c6066.5,2449.69) 6073.5,2449.69 6073.5,2433.69 ccw(c6080.5,2433.69) 6080.5,2426.69 ccw(c6080.5,2433.69) 6087.5,2433.69 6087.5,2449.69 cw(c6094.5,2449.69) 6094.5,2456.69 cw(c6094.5,2449.69) 6101.5,2449.69 6101.5,2433.69 ccw(c6108.5,2433.69) 6108.5,2426.69 ccw(c6108.5,2433.69) 6115.5,2433.69 6115.5,2449.69 cw(c6122.5,2449.69) 6122.5,2456.69 cw(c6122.5,2449.69) 6129.5,2449.69 6129.5,2433.69 ccw(c6136.5,2433.69) 6136.5,2426.69 ccw(c6136.5,2433.69) 6143.5,2433.69 6143.5,2449.69 cw(c6150.5,2449.69) 6150.5,2456.69 cw(c6150.5,2449.69) 6157.5,2449.69 6157.5,2433.69 ccw(c6164.5,2433.69) 6164.5,2426.69 ccw(c6164.5,2433.69) 6171.5,2433.69 6171.5,2449.69 cw(c6178.5,2449.69) 6178.5,2456.69 cw(c6178.5,2449.69) 6185.5,2449.69 6185.5,2433.69 ccw(c6192.5,2433.69) 6192.5,2426.69 ccw(c6192.5,2433.69) 6199.5,2433.69 6199.5,2449.69 cw(c6206.5,2449.69) 6206.5,2456.69 v1(6236.22,2456.69) ; R16.1@6157.48,1894.29 6157.48,1929.13 6173.23,1944.88 6173.23,1984.25 6196.85,2007.87 v1(6196.85,2031.5) ; v1(6204.72,2102.36) Q3.K3@6220.47,2118.11 ; Q2.K3@6220.47,2803.15 v1(6236.22,2787.4)
  Bottom Layer w4: v1(5414.17,2574.8) 5476.82,2574.8 5498.66,2552.96 5498.66,2548.58 5597.54,2449.7 5755.87,2449.7 5769.99,2463.82 5785.74,2463.82 5792.12,2457.44 5814.34,2457.44 cw(c5814.34,2451.14) 5820.64,2451.14 5820.64,2449.15 ccw(c5826.94,2449.15) 5826.94,2442.85 5828.34,2442.85 ccw(c5828.34,2449.15) 5834.64,2449.15 5834.64,2451.14 cw(c5840.94,2451.14) 5840.94,2457.44 5842.34,2457.44 cw(c5842.34,2451.14) 5848.64,2451.14 5848.64,2449.15 ccw(c5854.94,2449.15) 5854.94,2442.85 5856.34,2442.85 ccw(c5856.34,2449.15) 5862.64,2449.15 5862.64,2451.14 cw(c5868.94,2451.14) 5868.94,2457.44 5870.34,2457.44 cw(c5870.34,2451.14) 5876.64,2451.14 5876.64,2449.15 ccw(c5882.94,2449.15) 5882.94,2442.85 5884.34,2442.85 ccw(c5884.34,2449.15) 5890.64,2449.15 5890.64,2451.14 cw(c5896.94,2451.14) v1@5896.94,2457.44 ; v1(6204.72,2102.36) 6188.98,2086.61 6188.98,2028.06 6288.53,1928.5 6477.7,1928.5 6606.69,2057.49 6606.69,2795.92 6512.21,2890.4 6271.79,2890.4 6251.22,2869.83 6251.22,2850.27 cw(c6247.22,2850.27) 6247.22,2846.27 6241.84,2846.27 ccw(c6241.84,2842.27) 6237.84,2842.27 ccw(c6241.84,2842.27) 6241.84,2838.27 6247.22,2838.27 cw(c6247.22,2834.27) 6251.22,2834.27 6251.22,2820.56 6236.22,2805.56 v1(6236.22,2787.4) 6236.22,2763.78 ccw(c6240.22,2763.78) 6240.22,2759.78 6247.39,2759.78 cw(c6247.39,2755.78) 6251.39,2755.78 cw(c6247.39,2755.78) 6247.39,2751.78 6240.22,2751.78 ccw(c6240.22,2747.78) 6236.22,2747.78 ccw(c6240.22,2747.78) 6240.22,2743.78 6250.89,2743.78 cw(c6250.89,2739.78) 6254.89,2739.78 cw(c6250.89,2739.78) 6250.89,2735.78 6240.22,2735.78 ccw(c6240.22,2731.78) 6236.22,2731.78 6236.22,2683.78 ccw(c6240.22,2683.78) 6240.22,2679.78 6242.43,2679.78 cw(c6242.43,2675.78) 6246.43,2675.78 cw(c6242.43,2675.78) 6242.43,2671.78 6240.22,2671.78 ccw(c6240.22,2667.78) 6236.22,2667.78 ccw(c6240.22,2667.78) 6240.22,2663.78 6250.89,2663.78 cw(c6250.89,2659.78) 6254.89,2659.78 cw(c6250.89,2659.78) 6250.89,2655.78 6240.22,2655.78 ccw(c6240.22,2651.78) 6236.22,2651.78 ccw(c6240.22,2651.78) 6240.22,2647.78 6250.89,2647.78 cw(c6250.89,2643.78) 6254.89,2643.78 cw(c6250.89,2643.78) 6250.89,2639.78 6240.22,2639.78 ccw(c6240.22,2635.78) 6236.22,2635.78 ccw(c6240.22,2635.78) 6240.22,2631.78 6250.89,2631.78 cw(c6250.89,2627.78) 6254.89,2627.78 cw(c6250.89,2627.78) 6250.89,2623.78 6240.22,2623.78 ccw(c6240.22,2619.78) 6236.22,2619.78 ccw(c6240.22,2619.78) 6240.22,2615.78 6250.89,2615.78 cw(c6250.89,2611.78) 6254.89,2611.78 cw(c6250.89,2611.78) 6250.89,2607.78 6240.22,2607.78 ccw(c6240.22,2603.78) 6236.22,2603.78 ccw(c6240.22,2603.78) 6240.22,2599.78 6250.89,2599.78 cw(c6250.89,2595.78) 6254.89,2595.78 cw(c6250.89,2595.78) 6250.89,2591.78 6240.22,2591.78 ccw(c6240.22,2587.78) 6236.22,2587.78 ccw(c6240.22,2587.78) 6240.22,2583.78 6250.89,2583.78 cw(c6250.89,2579.78) 6254.89,2579.78 cw(c6250.89,2579.78) 6250.89,2575.78 6240.22,2575.78 ccw(c6240.22,2571.78) 6236.22,2571.78 ccw(c6240.22,2571.78) 6240.22,2567.78 6250.89,2567.78 cw(c6250.89,2563.78) 6254.89,2563.78 cw(c6250.89,2563.78) 6250.89,2559.78 6240.22,2559.78 ccw(c6240.22,2555.78) 6236.22,2555.78 ccw(c6240.22,2555.78) 6240.22,2551.78 6250.89,2551.78 cw(c6250.89,2547.78) 6254.89,2547.78 cw(c6250.89,2547.78) 6250.89,2543.78 6240.22,2543.78 ccw(c6240.22,2539.78) 6236.22,2539.78 v1(6236.22,2456.69)
CK_N: Q1.N18 Q2.K7 Q3.K7 R30.1 | length 4120.5
  Top Layer w4: Q1.N18@5335.43,2622.05 v1(5351.18,2606.3) ; v1(5779.53,2448.82) 5779.53,2488.19 5842.38,2551.04 5842.38,2583.59 ccw(c5837.58,2583.59) 5837.58,2588.39 5817.43,2588.39 cw(c5817.43,2601.2) 5804.62,2601.2 5804.62,2605.6 cw(c5817.43,2605.6) 5817.43,2618.42 5837.58,2618.42 ccw(c5837.58,2623.22) 5842.38,2623.22 5842.38,2627.62 ccw(c5837.58,2627.62) 5837.58,2632.42 5817.43,2632.42 cw(c5817.43,2645.23) 5804.62,2645.23 5804.62,2649.64 cw(c5817.43,2649.64) 5817.43,2662.45 5875.34,2662.45 ccw(c5875.34,2667.25) 5880.14,2667.25 5880.14,2671.65 ccw(c5875.34,2671.65) 5875.34,2676.45 5828.82,2676.45 cw(c5828.82,2689.26) 5816,2689.26 5816,2693.67 cw(c5828.82,2693.67) 5828.82,2706.48 5875.34,2706.48 ccw(c5875.34,2711.28) 5880.14,2711.28 5880.14,2715.68 ccw(c5875.34,2715.68) 5875.34,2720.48 5855.19,2720.48 cw(c5855.19,2733.29) 5842.38,2733.29 5842.38,2737.7 cw(c5855.19,2737.7) 5855.19,2750.51 5875.34,2750.51 ccw(c5875.34,2755.31) 5880.14,2755.31 5880.14,2759.71 ccw(c5875.34,2759.71) 5875.34,2764.51 5855.19,2764.51 cw(c5855.19,2777.33) 5842.38,2777.33 5842.38,2834.65 ; 5842.39,2826.77 5842.39,2960.13 cw(c5854.39,2960.13) 5854.39,2972.13 5858.39,2972.13 ccw(c5858.39,2976.13) 5862.39,2976.13 ccw(c5858.39,2976.13) 5858.39,2980.13 5854.39,2980.13 cw(c5854.39,2992.13) 5842.39,2992.13 5842.39,3015.62 5889.89,3063.12 5913.39,3063.12 5957.3,3063.12 cw(c5957.3,3050.32) 5970.1,3050.32 5970.1,3047.92 ccw(c5974.9,3047.92) 5974.9,3043.12 5979.3,3043.12 ccw(c5979.3,3047.92) 5984.1,3047.92 5984.1,3050.32 cw(c5996.9,3050.32) 5996.9,3063.12 6001.3,3063.12 cw(c6001.3,3050.32) 6014.1,3050.32 6014.1,3047.92 ccw(c6018.9,3047.92) 6018.9,3043.12 6023.3,3043.12 ccw(c6023.3,3047.92) 6028.1,3047.92 6028.1,3050.32 cw(c6040.9,3050.32) 6040.9,3063.12 6045.3,3063.12 cw(c6045.3,3050.32) 6058.1,3050.32 6058.1,3047.92 ccw(c6062.9,3047.92) 6062.9,3043.12 6067.3,3043.12 ccw(c6067.3,3047.92) 6072.1,3047.92 6072.1,3050.32 cw(c6084.9,3050.32) 6084.9,3063.12 6089.3,3063.12 cw(c6089.3,3050.32) 6102.1,3050.32 6102.1,3047.92 ccw(c6106.9,3047.92) 6106.9,3043.12 6111.3,3043.12 ccw(c6111.3,3047.92) 6116.1,3047.92 6116.1,3050.32 cw(c6128.9,3050.32) 6128.9,3063.12 6133.3,3063.12 cw(c6133.3,3050.32) 6146.1,3050.32 6146.1,3047.92 ccw(c6150.9,3047.92) 6150.9,3043.12 6155.3,3043.12 ccw(c6155.3,3047.92) 6160.1,3047.92 6160.1,3050.32 cw(c6172.9,3050.32) 6172.9,3063.12 6181.1,3063.12 6191.51,3063.12 6198.51,3070.12 6219.22,3070.12 v1(6220.22,3071.12) ; v1(6204.72,2228.35) Q3.K7@6220.47,2244.09 ; Q2.K7@6220.47,2929.13 v1(6236.22,2944.88)
  Bottom Layer w4: v1(5351.18,2606.3) 5367.12,2590.36 5367.12,2568.36 5376.42,2559.06 5481.25,2559.06 5490.66,2549.64 5490.66,2539.84 5588.8,2441.7 5772.41,2441.7 v1(5779.53,2448.82) ; v1(6204.72,2228.35) 6218.6,2242.22 6251.97,2242.22 6299.21,2242.22 ; v1(6220.22,3071.12) 6220.22,2960.88 v1(6236.22,2944.88) 6220.6,2929.26 6220.6,2707.54 6220.72,2707.41 6220.72,2338.33 6244.09,2314.96 6251.97,2314.96 ccw(c6251.97,2317.2) 6254.2,2317.2 6254.2,2375.34 cw(c6266.2,2375.34) 6278.2,2375.34 6278.2,2318.96 ccw(c6282.2,2318.96) 6286.2,2318.96 6286.2,2357.03 cw(c6298.2,2357.03) 6310.2,2357.03 6310.2,2318.96 ccw(c6314.2,2318.96) 6318.2,2318.96 6318.2,2342.21 cw(c6330.2,2342.21) 6342.2,2342.21 6342.2,2318.96 ccw(c6346.2,2318.96) 6346.2,2314.96 6433.07,2314.96 6452.76,2295.28 6456.82,2291.21 6456.82,2256.53 6442.51,2242.22 6433.07,2242.22 ccw(c6433.07,2238.22) 6429.07,2238.22 6429.07,2184.36 cw(c6415.32,2184.36) 6401.57,2184.36 6401.57,2281.9 ccw(c6397.57,2281.9) 6393.57,2281.9 6393.57,2191.06 cw(c6379.83,2191.06) 6366.08,2191.06 6366.08,2281.9 ccw(c6362.08,2281.9) 6358.08,2281.9 6358.08,2255.97 cw(c6344.33,2255.97) 6344.33,2242.22 6299.21,2242.22 ; R30.1@6291.34,2225 6291.34,2234.35 6299.21,2242.22